# Altium PCB PlacaFiltroFinal.PcbDoc
Units mm, origin at the board's own origin, x right, y up, seen from the top; angles counter-clockwise.
Board outline 150 x 100 mm, 2 copper layers (Top Layer, Bottom Layer); 98 components, 70 nets, 261 pads, 36 vias.
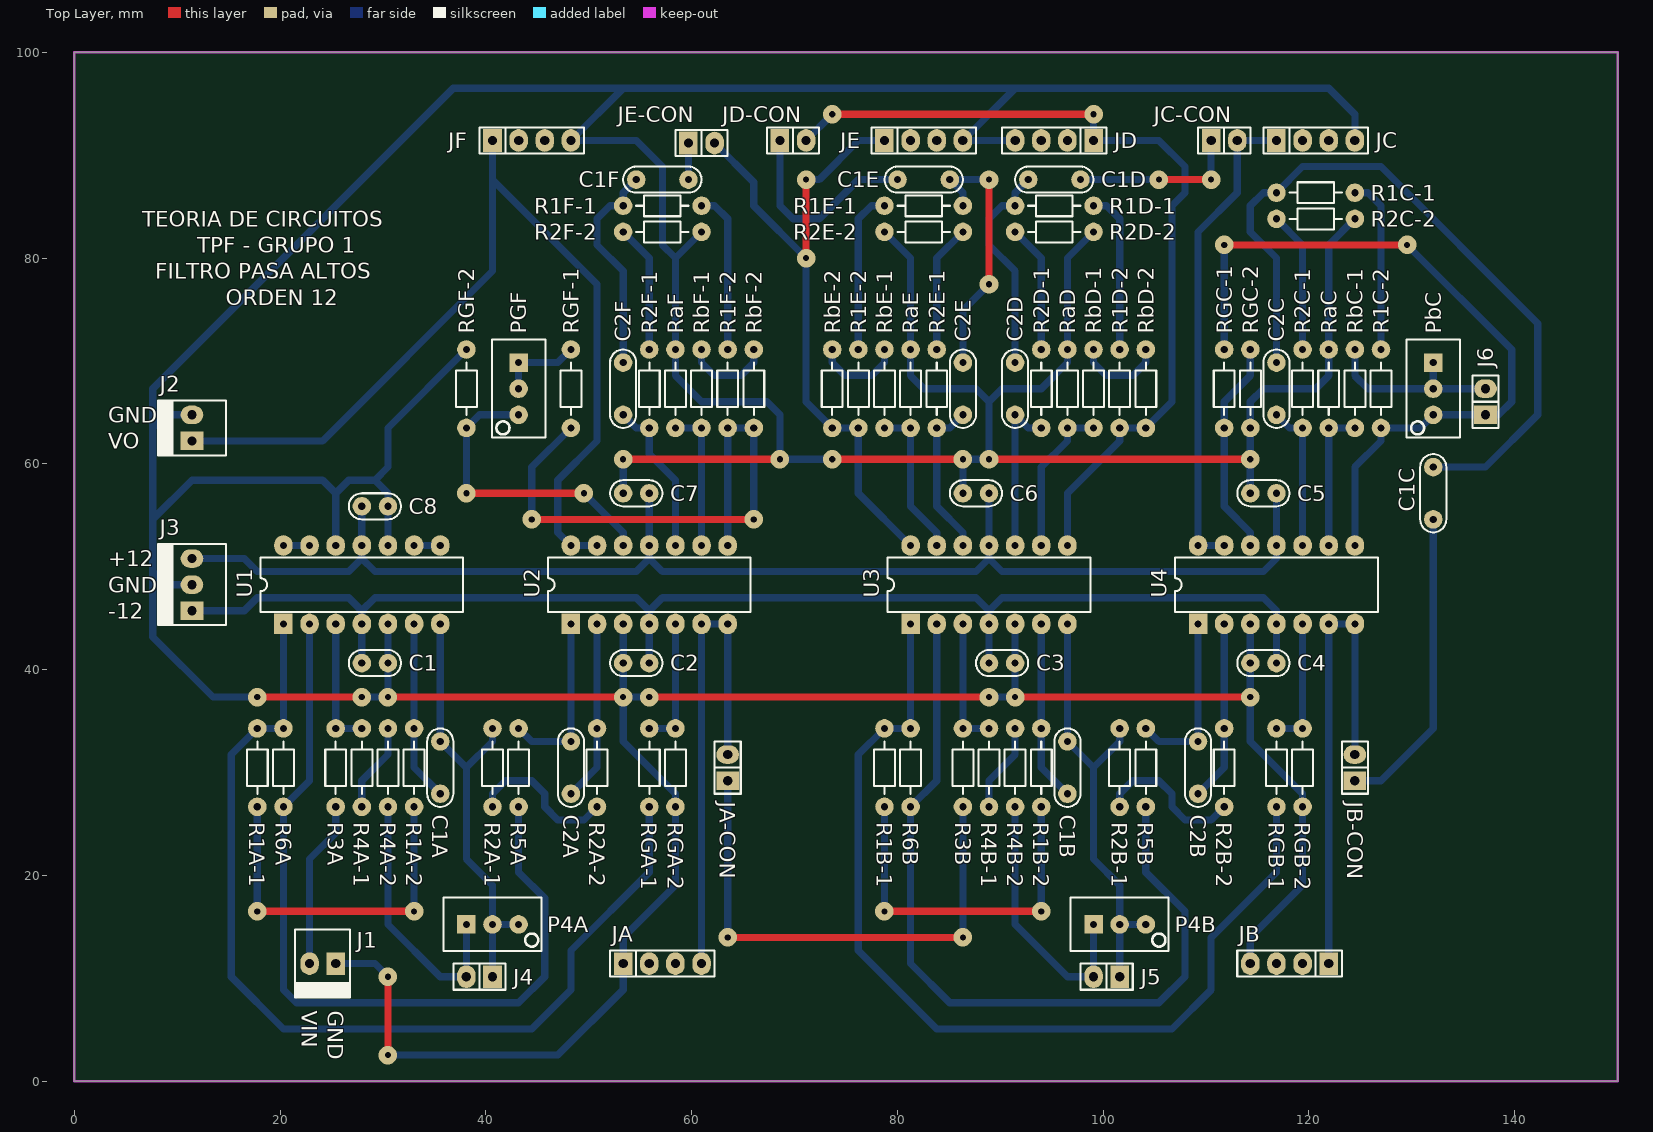
[diagram p0: Top Layer view]
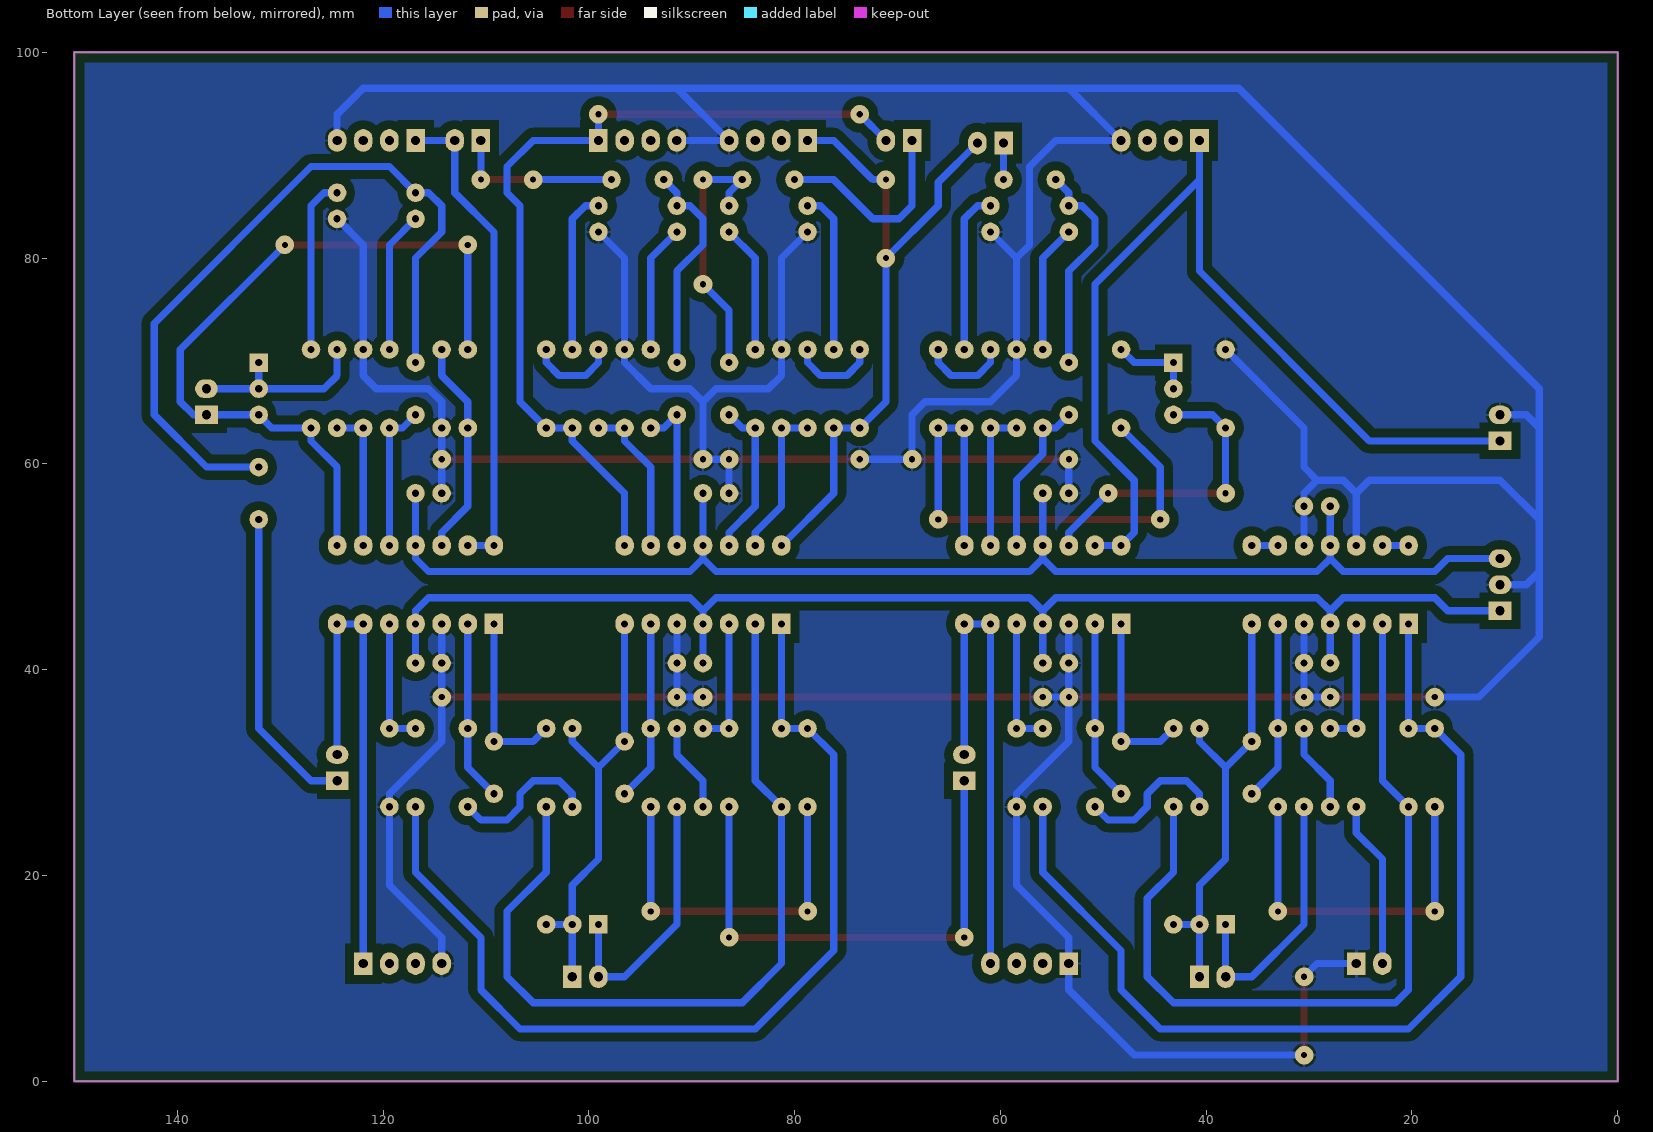
[diagram p1: Bottom Layer view, seen from below]
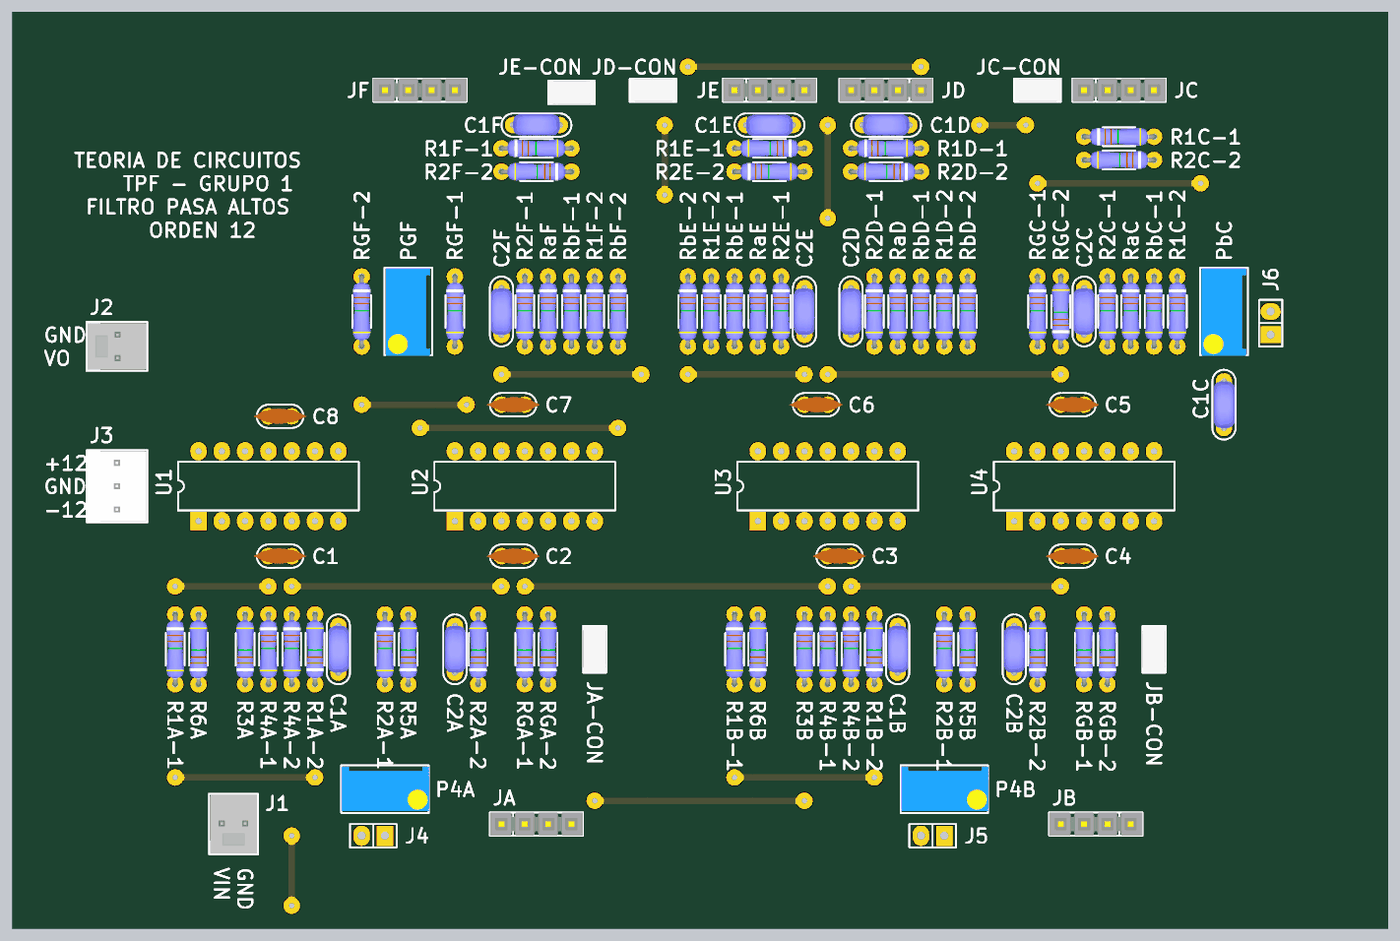
[diagram p2: 3D render of the assembled board from above, using the file's embedded part models]

## Layer stack, top to bottom
Top Solder: solder mask 0.0102, Solder Resist, Dk 3.5
Top Layer: signal copper 0.0356
Dielectric 1: dielectric 0.32, FR-4, Dk 4.8
Bottom Layer: signal copper 0.0356
Bottom Solder: solder mask 0.0102, Solder Resist, Dk 3.5

## Board outline
0,0 0,100 150,100 150,0

## Design rules (kind name [scope] priority, off if disabled: settings)
Clearance [All] p1: gap=0.7
PolygonConnect [All] p1: connectstyle=Relief reliefconductorwidth=0.254 reliefentries=4 polygonreliefangle="90 Angle" airgapwidth=0.254
RoutingVias [All] p1: holewidth=0.6 width=1.8 viastyle="Through Hole" minholewidth=0.6 minwidth=1.8 maxholewidth=0.6 maxwidth=1.8
SolderMaskExpansion [All] p1: expansion=0.102
Width [All] p1: maxlimit=0.7 minlimit=0.7 preferedwidth=0.7
30 further rules are at their usual default settings.

## Components (designator, comment, footprint, x,y, rotation, side; value= is the part's Value field where it differs from the comment)
C1 "100n" CAP100 29.21,40.64 r0 top
C1A "1n" CAP200 35.56,30.48 r90 top
C1B "4.7n" CAP200 96.52,30.48 r90 top
C1C "5.6n" CAP200 132.08,57.15 r90 top
C1D "3.3n" CAP200 95.25,87.63 r180 top
C1E "3.3n" CAP200 82.55,87.63 r0 top
C1F "2.2n" CAP200 57.15,87.63 r180 top
C2 "100n" CAP100 54.61,40.64 r180 top
C2A "1n" CAP200 48.26,30.48 r90 top
C2B "4.7n" CAP200 109.22,30.48 r90 top
C2C "5.6n" CAP200 116.84,67.31 r270 top
C2D "3.3n" CAP200 91.44,67.31 r270 top
C2E "3.3n" CAP200 86.36,67.31 r270 top
C2F "2.2n" CAP200 53.34,67.31 r270 top
C3 "100n" CAP100 90.17,40.64 r0 top
C4 "100n" CAP100 115.57,40.64 r180 top
C5 "100n" CAP100 115.57,57.15 r180 top
C6 "100n" CAP100 87.63,57.15 r180 top
C7 "100n" CAP100 54.61,57.15 r180 top
C8 "100n" CAP100 29.21,55.88 r0 top
J1 "VIN" MOLEX2 25.4,11.43 r180 top
J2 "VOUT" MOLEX2 11.43,62.23 r90 top
J3 "FUENTE" MOLEX3 11.43,45.72 r90 top
J4 "P4A" SIP2 39.37,10.16 r180 top
J5 "P4B" SIP2 100.33,10.16 r180 top
J6 "PbC" SIP2 137.16,66.04 r90 top
JA "KHN1" SIP4 57.15,11.43 r0 top
JA-CON "KHN1-KHN2" JUMPER2 63.5,30.48 r90 top
JB "KHN2" SIP4 118.11,11.43 r180 top
JB-CON "KHN2-SK3" JUMPER2 124.46,30.48 r90 top
JC "SK3" SIP4 120.65,91.44 r0 top
JC-CON "SK3-SK4" JUMPER2 111.76,91.44 r0 top
JD "SK4" SIP4 95.25,91.44 r180 top
JD-CON "SK4-SK5" JUMPER2 69.85,91.44 r0 top
JE "SK5" SIP4 82.55,91.44 r0 top
JE-CON "SK5-SK6" JUMPER2 60.96,91.186 r0 top
JF "SK6" SIP4 44.45,91.44 r0 top
P4A "2K" "PRESET V" 40.64,15.24 r0 top
P4B "2K" "PRESET V" 101.6,15.24 r0 top
PbC "500" "PRESET V" 132.08,67.31 r270 top
PGF "10K" "PRESET V" 43.18,67.31 r270 top
R1A-1 "12K" RES300 17.78,34.29 r270 top
R1A-2 "220" RES300 33.02,26.67 r90 top
R1B-1 "2K" RES300 78.74,34.29 r270 top
R1B-2 "470" RES300 93.98,26.67 r90 top
R1C-1 "1K1" RES300 116.84,86.36 r0 top
R1C-2 "680" RES300 127,71.12 r270 top
R1D-1 "2K" RES300 91.44,85.09 r0 top
R1D-2 "470" RES300 101.6,71.12 r270 top
R1E-1 "1K74" RES300 86.36,85.09 r180 top
R1E-2 "120" RES300 76.2,71.12 r270 top
R1F-1 "2K" RES300 53.34,85.09 r0 top
R1F-2 "120" RES300 63.5,71.12 r270 top
R2A-1 "12K" RES300 40.64,34.29 r270 top
R2A-2 "220" RES300 50.8,26.67 r90 top
R2B-1 "2K" RES300 101.6,34.29 r270 top
R2B-2 "470" RES300 111.76,26.67 r90 top
R2C-1 "1K1" RES300 119.38,71.12 r270 top
R2C-2 "680K" RES300 124.46,83.82 r180 top
R2D-1 "2K" RES300 93.98,71.12 r270 top
R2D-2 "470" RES300 99.06,82.55 r180 top
R2E-1 "1K74" RES300 83.82,71.12 r270 top
R2E-2 "120" RES300 78.74,82.55 r0 top
R2F-1 "2K" RES300 55.88,71.12 r270 top
R2F-2 "120" RES300 60.96,82.55 r180 top
R3A "1K" RES300 25.4,26.67 r90 top
R3B "2K2" RES300 86.36,34.29 r270 top
R4A-1 "12K" RES300 27.94,34.29 r270 top
R4A-2 "1K" RES300 30.48,34.29 r270 top
R4B-1 "10K" RES300 88.9,34.29 r270 top
R4B-2 "1K" RES300 91.44,34.29 r270 top
R5A "15K" RES300 43.18,26.67 r90 top
R5B "10K" RES300 104.14,26.67 r90 top
R6A "15K" RES300 20.32,26.67 r90 top
R6B "10K" RES300 81.28,26.67 r90 top
RaC "1K" RES300 121.92,71.12 r270 top
RaD "1K5" RES300 96.52,71.12 r270 top
RaE "10K" RES300 81.28,71.12 r270 top
RaF "10K" RES300 58.42,71.12 r270 top
RbC-1 "1K2" RES300 124.46,71.12 r270 top
RbD-1 "1K74" RES300 99.06,71.12 r270 top
RbD-2 "X" RES300 104.14,71.12 r270 top
RbE-1 "3K9" RES300 78.74,71.12 r270 top
RbE-2 "2K7" RES300 73.66,71.12 r270 top
RbF-1 "1K" RES300 60.96,71.12 r270 top
RbF-2 "120" RES300 66.04,71.12 r270 top
RGA-1 "47K" RES300 55.88,26.67 r90 top
RGA-2 "47K" RES300 58.42,26.67 r90 top
RGB-1 "47K" RES300 116.84,26.67 r90 top
RGB-2 "56K" RES300 119.38,26.67 r90 top
RGC-1 "15K" RES300 111.76,71.12 r270 top
RGC-2 "10K" RES300 114.3,63.5 r90 top
RGF-1 "15K" RES300 48.26,71.12 r270 top
RGF-2 "10K" RES300 38.1,71.12 r270 top
U1 "TL084ACN" 646-06 27.94,48.26 r0 top
U2 "TL084ACN" 646-06 55.88,48.26 r0 top
U3 "TL084ACN" 646-06 88.9,48.26 r0 top
U4 "TL084ACN" 646-06 116.84,48.26 r0 top

## Footprints (in the part's own frame and the unit in brackets; to place one, negate y for a bottom-side part, rotate by r counter-clockwise, add the part's x,y. Pads: shape width x height; smd on the part's side, far side on the other; paste and mask are expansions set on the pad)
646-06 [mm] "DIP; 14 Leads; Row Spacing 7.62 mm; Pitch 2.54 mm"
  rect 1.8x2 hole 0.7: 1(-7.62,-3.81)
  oval 1.8x2 hole 0.7: 2(-5.08,-3.81) 3(-2.54,-3.81) 4(0,-3.81) 5(2.54,-3.81) 6(5.08,-3.81) 7(7.62,-3.81) 8(7.62,3.81) 9(5.08,3.81) 10(2.54,3.81) 11(0,3.81) 12(-2.54,3.81) 13(-5.08,3.81) 14(-7.62,3.81)
  silkscreen extent -9.85,-2.65 9.85,2.65
CAP100 [mm]
  round 1.8 hole 0.7: 1(-1.27,0) 2(1.27,0)
  silkscreen extent -2.54,-1.27 2.54,1.27, body extent -2.92,-0.84 2.92,0.86, height 6.12
CAP200 [mm]
  round 1.8 hole 0.7: 1(-2.54,0) 2(2.54,0)
  silkscreen extent -3.81,-1.27 3.81,1.27, body extent -2.79,-1.17 2.79,1.12, height 6.24
JUMPER2 [mm]
  rect 1.8x2.2 hole 0.9: 1(-1.27,0)
  oval 1.8x2.2 hole 0.9: 2(1.27,0)
  silkscreen extent -2.54,-1.27 2.54,1.27, body extent -2.46,-1.27 2.54,1.27, height 9.5
MOLEX2 [mm]
  rect 1.8x2.2 hole 0.9: 1(0,0)
  oval 1.8x2.2 hole 0.9: 2(2.54,0)
  silkscreen extent -1.4,-3.3 3.94,3.3, body extent -1.27,-3.17 3.81,3.18, height 10.74
MOLEX3 [mm]
  rect 1.8x2.2 hole 0.9: 1(0,0)
  oval 1.8x2.2 hole 0.9: 2(2.54,0) 3(5.08,0)
  silkscreen extent -1.4,-3.3 6.48,3.3, body extent -1.27,-3.17 6.35,3.18, height 10.74
"PRESET V" [mm]
  rect 1.8x1.8 hole 0.7: 1(-2.54,0)
  round 1.8 hole 0.7: 2(0,0) 3(2.54,0)
  silkscreen extent -4.76,-2.6 4.76,2.6, body extent -4.7,-2.42 4.83,2.42, height 11.55
RES300 [mm]
  round 1.8 hole 0.7: 1(0,0) 2(7.62,0)
  silkscreen extent 1.27,-1.02 6.35,1.02, body extent -0.25,-0.97 7.87,0.97, height 2.01
SIP2 [mm]
  rect 1.8x2.2 hole 0.9: 1(-1.27,0)
  oval 1.8x2.2 hole 0.9: 2(1.27,0)
  silkscreen extent -2.54,-1.27 2.54,1.27
SIP4 [mm]
  rect 1.8x2.2 hole 0.9: 1(-3.81,0)
  oval 1.8x2.2 hole 0.9: 2(-1.27,0) 3(1.27,0) 4(3.81,0)
  silkscreen extent -5.08,-1.27 5.08,1.27, body extent -5.08,-1.27 5.08,1.27, height 8.38

## Part data
C1 C1A C1B C1C C1D C1E C1F C2 C2A C2B C2C C2D C2E C2F C3 C4 C5 C6 C7 C8: library part CAP
J1 J2: library part MOLEX2
J3: library part MOLEX3
J4 J5 J6: library part CON2
JA JB JC JD JE JF: library part CON4
JA-CON JB-CON JC-CON JD-CON JE-CON: library part JUMPER
P4A P4B PbC PGF: library part PRESET
R1A-1 R1A-2 R1B-1 R1B-2 R1C-1 R1C-2 R1D-1 R1D-2 R1E-1 R1E-2 R1F-1 R1F-2 R2A-1 R2A-2 R2B-1 R2B-2 R2C-1 R2C-2 R2D-1 R2D-2 R2E-1 R2E-2 R2F-1 R2F-2 R3A R3B R4A-1 R4A-2 R4B-1 R4B-2 R5A R5B R6A R6B RaC RaD RaE RaF RbC-1 RbD-1 RbD-2 RbE-1 RbE-2 RbF-1 RbF-2 RGA-1 RGA-2 RGB-1 RGB-2 RGC-1 RGC-2 RGF-1 RGF-2: library part RES
U1 U2 U3 U4: "JFET-Input Operational Amplifier"

## Via types
v1: diameter 1.8, hole 0.6, Top Layer to Bottom Layer, 36 vias

## Nets (pads, with @x,y where several pads share a name; then routed paths per layer and width w, separated by ;. In a path a pad name is that pad's centre, name@x,y a point inside that pad or via, vN(x,y) a via of type N, cw(c..) or ccw(c..) an arc to the next point about the centre after c; other vN are vias at no path point)
GND: C1.2 C2.2 C3.2 C4.2 C5.2 C6.2 C7.2 C8.2 J1.1 J2.2 J3.2 JA.1 JB.4 JC.4 JD.4 JE.4 JF.4 R2C-2.1 R2D-2.1 R2E-2.1 R2F-2.1 RaC.1 RaD.1 RaE.1 RaF.1 RGA-2.1 RGB-2.1 RGC-2.1 RGF-2.1 U1.5 U1.10 U1.12 U2.3 U3.5 U4.3 | length 680.5
  Top Layer w0.7: v1(17.78,37.338) v1(27.94,37.338) ; v1(30.48,2.54) v1(30.48,10.16) ; v1(30.48,37.338) v1(53.34,37.338) ; v1(53.34,60.452) v1(68.58,60.452) ; v1(55.88,37.338) v1(88.9,37.338) ; v1(73.66,60.452) v1(86.36,60.452) ; v1(88.9,60.452) v1(114.3,60.452) ; v1(91.44,37.338) v1(114.3,37.338)
  Bottom Layer w0.7: J3.2 8.89,48.26 7.62,49.53 ; J2.2 8.89,64.77 7.62,63.5 ; v1(17.78,37.338) 13.462,37.338 7.62,43.18 7.62,49.53 ; J1.1 29.21,11.43 v1(30.48,10.16) ; U1.12 25.4,57.15 ; v1(27.94,37.338) v1(30.48,37.338) C1.2 U1.5 ; v1(30.48,2.54) 46.99,2.54 53.34,8.89 JA.1 53.34,13.97 58.42,19.05 RGA-2.1 58.42,27.94 53.34,33.02 v1(53.34,37.338) ; U1.10 C8.2 30.48,57.15 29.21,58.42 ; RGF-2.1 30.48,63.5 30.48,59.69 29.21,58.42 ; U2.3 C2.2 v1(53.34,37.338) ; C7.2 v1(53.34,60.452) ; v1(55.88,37.338) v1(53.34,37.338) ; R2F-2.1 58.42,80.01 ; v1(73.66,60.452) v1(68.58,60.452) 68.58,64.77 67.31,66.04 60.96,66.04 58.42,68.58 RaF.1 58.42,80.01 ; R2E-2.1 81.28,80.01 RaE.1 81.28,68.58 82.55,67.31 87.63,67.31 88.9,66.04 ; C6.2 v1(86.36,60.452) v1(88.9,60.452) 88.9,66.04 ; v1(88.9,37.338) v1(91.44,37.338) C3.2 U3.5 ; JD.4 JE.4 91.44,96.52 ; R2D-2.1 96.52,80.01 RaD.1 96.52,69.85 93.98,67.31 90.17,67.31 88.9,66.04 ; JB.4 114.3,13.97 119.38,19.05 RGB-2.1 119.38,27.94 114.3,33.02 v1(114.3,37.338) C4.2 U4.3 ; C5.2 v1(114.3,60.452) RGC-2.1 114.3,66.04 115.57,67.31 120.65,67.31 121.92,68.58 RaC.1 121.92,81.28 R2C-2.1 ; JC.4 124.46,93.98 121.92,96.52 91.44,96.52 ; 7.62,49.53 7.62,54.61 ; 7.62,54.61 7.62,63.5 ; 7.62,54.61 11.43,58.42 24.13,58.42 25.4,57.15 ; 7.62,63.5 7.62,67.31 36.83,96.52 53.34,96.52 ; 25.4,57.15 26.67,58.42 29.21,58.42 ; 53.34,96.52 91.44,96.52 ; 53.34,96.52 JF.4 54.61,91.44 57.15,88.9 57.15,81.28 58.42,80.01
KHN1-KHN2: JA-CON.2 JA.4 U2.6 U2.7 | length 48.3
  Bottom Layer w0.7: JA.4 U2.6 U2.7 JA-CON.2
NetC1A_1: C1A.1 R1A-2.2 U1.6 | length 17.6
  Bottom Layer w0.7: U1.6 R1A-2.2 33.02,30.48 C1A.1
NetC1A_2: C1A.2 J4.1 P4A.2 P4A.3 R2A-1.1 U1.7 | length 43.8
  Bottom Layer w0.7: U1.7 C1A.2 38.1,30.48 ; J4.1 P4A.2 ; R2A-1.1 40.64,33.02 38.1,30.48 ; P4A.3 P4A.2 ; 38.1,30.48 38.1,21.59 40.64,19.05 P4A.2
NetC1B_1: C1B.1 R1B-2.2 U3.6 | length 17.6
  Bottom Layer w0.7: U3.6 R1B-2.2 93.98,30.48 C1B.1
NetC1B_2: C1B.2 J5.1 P4B.2 P4B.3 R2B-1.1 U3.7 | length 43.8
  Bottom Layer w0.7: U3.7 C1B.2 99.06,30.48 ; J5.1 P4B.2 ; R2B-1.1 101.6,33.02 99.06,30.48 ; P4B.3 P4B.2 ; 99.06,30.48 99.06,21.59 101.6,19.05 P4B.2
NetC1C_1: C1C.1 JB-CON.1 | length 30
  Bottom Layer w0.7: JB-CON.1 127,29.21 132.08,34.29 C1C.1
NetC1C_2: C1C.2 C2C.1 R1C-1.1 | length 73.3
  Bottom Layer w0.7: C2C.1 116.84,80.01 114.3,82.55 114.3,85.09 115.57,86.36 R1C-1.1 119.38,88.9 127,88.9 142.24,73.66 142.24,64.77 137.16,59.69 C1C.2
NetC1D_1: C1D.1 JC-CON.1 | length 16.5
  Top Layer w0.7: v1(105.41,87.63) v1(110.49,87.63)
  Bottom Layer w0.7: C1D.1 v1(105.41,87.63) ; v1(110.49,87.63) JC-CON.1
NetC1D_2: C1D.2 C2D.1 R1D-1.1 | length 21.2
  Bottom Layer w0.7: C2D.1 91.44,78.74 88.9,81.28 88.9,83.82 90.17,85.09 R1D-1.1 91.44,86.36 C1D.2
NetC1E_1: C1E.1 JD-CON.1 | length 19.9
  Bottom Layer w0.7: JD-CON.1 68.58,85.09 69.85,83.82 72.39,83.82 76.2,87.63 C1E.1
NetC1E_2: C1E.2 C2E.1 R1E-1.1 | length 25.7
  Top Layer w0.7: v1(88.9,77.47) v1(88.9,87.63)
  Bottom Layer w0.7: C2E.1 86.36,74.93 v1(88.9,77.47) ; R1E-1.1 86.36,86.36 C1E.2 v1(88.9,87.63)
NetC1F_1: C1F.1 JE-CON.1 | length 3.6
  Bottom Layer w0.7: C1F.1 JE-CON.1
NetC1F_2: C1F.2 C2F.1 R1F-1.1 | length 21.2
  Bottom Layer w0.7: C2F.1 53.34,78.74 50.8,81.28 50.8,83.82 52.07,85.09 R1F-1.1 53.34,86.36 C1F.2
NetC2A_1: C2A.1 R2A-2.2 U2.2 | length 17.6
  Bottom Layer w0.7: C2A.1 50.8,30.48 R2A-2.2 U2.2
NetC2A_2: C2A.2 R5A.2 U2.1 | length 17
  Bottom Layer w0.7: R5A.2 44.45,33.02 C2A.2 U2.1
NetC2B_1: C2B.1 R2B-2.2 U4.2 | length 17.6
  Bottom Layer w0.7: C2B.1 111.76,30.48 R2B-2.2 U4.2
NetC2B_2: C2B.2 R5B.2 U4.1 | length 17
  Bottom Layer w0.7: R5B.2 105.41,33.02 C2B.2 U4.1
NetC2C_2: C2C.2 R2C-1.2 U4.10 | length 14.5
  Bottom Layer w0.7: C2C.2 118.11,63.5 R2C-1.2 U4.10
NetC2D_2: C2D.2 R2D-1.2 U3.10 | length 15.8
  Bottom Layer w0.7: U3.10 C2D.2 92.71,63.5 R2D-1.2
NetC2E_2: C2E.2 R2E-1.2 U3.12 | length 15.5
  Bottom Layer w0.7: U3.12 86.36,53.34 83.82,55.88 R2E-1.2 85.09,63.5 C2E.2
NetC2F_2: C2F.2 R2F-1.2 U2.10 | length 15.5
  Bottom Layer w0.7: C2F.2 54.61,63.5 R2F-1.2 55.88,60.96 58.42,58.42 U2.10
NetJ1_2: J1.2 R3A.1 | length 16.3
  Bottom Layer w0.7: J1.2 22.86,21.59 25.4,24.13 R3A.1
NetJ2_1: J2.1 JF.1 U2.13 U2.14 | length 93.2
  Bottom Layer w0.7: J2.1 24.13,62.23 40.64,78.74 40.64,87.63 ; JF.1 40.64,87.63 ; U2.13 U2.14 46.99,53.34 46.99,58.42 50.8,62.23 50.8,77.47 40.64,87.63
NetJ4_2: J4.2 P4A.1 R4A-2.2 | length 26.2
  Bottom Layer w0.7: R4A-2.2 30.48,15.24 35.56,10.16 J4.2 P4A.1
NetJ5_2: J5.2 P4B.1 R4B-2.2 | length 26.2
  Bottom Layer w0.7: R4B-2.2 91.44,15.24 96.52,10.16 J5.2 P4B.1
NetJ6_1: J6.1 PbC.3 R1C-2.2 RGC-1.1 U4.8 | length 73.6
  Top Layer w0.7: v1(111.76,81.28) v1(129.54,81.28)
  Bottom Layer w0.7: RGC-1.1 v1(111.76,81.28) ; U4.8 124.46,59.69 127,62.23 R1C-2.2 130.81,63.5 PbC.3 J6.1 138.43,64.77 139.7,66.04 139.7,71.12 v1(129.54,81.28)
NetJ6_2: J6.2 PbC.1 PbC.2 RbC-1.1 | length 18.3
  Bottom Layer w0.7: RbC-1.1 124.46,68.58 125.73,67.31 PbC.2 ; PbC.1 PbC.2 ; J6.2 PbC.2
NetJA-CON_1: JA-CON.1 R3B.2 | length 50.8
  Top Layer w0.7: v1(63.5,13.97) v1(86.36,13.97)
  Bottom Layer w0.7: v1(63.5,13.97) JA-CON.1 ; v1(86.36,13.97) R3B.2
NetJB_1: JB-CON.2 JB.1 U4.6 U4.7 | length 48.3
  Bottom Layer w0.7: JB.1 U4.6 U4.7 JB-CON.2
NetJC_1: JC-CON.2 JC.1 U4.13 U4.14 | length 47.3
  Bottom Layer w0.7: U4.13 U4.14 109.22,82.55 113.03,86.36 JC-CON.2 JC.1
NetJE_1: JE-CON.2 JE.1 R1E-2.2 RbE-2.2 U3.14 | length 65.3
  Top Layer w0.7: v1(71.12,80.01) v1(71.12,87.63)
  Bottom Layer w0.7: JE-CON.2 66.04,87.376 66.04,85.09 v1(71.12,80.01) 71.12,66.04 RbE-2.2 R1E-2.2 76.2,57.15 U3.14 ; v1(71.12,87.63) 72.39,87.63 76.2,91.44 JE.1
NetPGF_1: PGF.1 PGF.2 RGF-1.1 | length 8.1
  Bottom Layer w0.7: PGF.2 PGF.1 46.99,69.85 RGF-1.1
NetPGF_3: PGF.3 RGF-2.2 U2.12 | length 30
  Top Layer w0.7: v1(38.1,57.15) v1(49.53,57.15)
  Bottom Layer w0.7: v1(38.1,57.15) RGF-2.2 39.37,64.77 PGF.3 ; v1(49.53,57.15) 53.34,53.34 U2.12
NetR1A-1_2: R1A-1.2 R1A-2.1 | length 35.6
  Top Layer w0.7: v1(17.78,16.51) v1(33.02,16.51)
  Bottom Layer w0.7: v1(17.78,16.51) R1A-1.2 ; v1(33.02,16.51) R1A-2.1
NetR1B-1_2: R1B-1.2 R1B-2.1 | length 35.6
  Top Layer w0.7: v1(78.74,16.51) v1(93.98,16.51)
  Bottom Layer w0.7: v1(78.74,16.51) R1B-1.2 ; v1(93.98,16.51) R1B-2.1
NetR1C-1_2: R1C-1.2 R1C-2.1 | length 17
  Bottom Layer w0.7: R1C-1.2 125.73,86.36 127,85.09 R1C-2.1
NetR1D-1_2: R1D-1.2 R1D-2.1 | length 15.8
  Bottom Layer w0.7: R1D-1.2 100.33,85.09 101.6,83.82 R1D-2.1
NetR1E-1_2: R1E-1.2 R1E-2.1 | length 15.8
  Bottom Layer w0.7: R1E-2.1 76.2,83.82 77.47,85.09 R1E-1.2
NetR1F-1_2: R1F-1.2 R1F-2.1 | length 15.8
  Bottom Layer w0.7: R1F-1.2 62.23,85.09 63.5,83.82 R1F-2.1
NetR1F-2_2: R1F-2.2 RbF-2.2 RGF-1.2 U2.8 | length 54.9
  Top Layer w0.7: v1(44.45,54.61) v1(66.04,54.61)
  Bottom Layer w0.7: v1(44.45,54.61) 44.45,59.69 RGF-1.2 ; U2.8 R1F-2.2 RbF-2.2 v1(66.04,54.61)
NetR2A-1_2: R2A-1.2 R2A-2.1 | length 14.8
  Bottom Layer w0.7: R2A-1.2 40.64,27.94 41.91,29.21 44.45,29.21 45.72,27.94 45.72,26.67 46.99,25.4 49.53,25.4 R2A-2.1
NetR2B-1_2: R2B-1.2 R2B-2.1 | length 14.8
  Bottom Layer w0.7: R2B-1.2 101.6,27.94 102.87,29.21 105.41,29.21 106.68,27.94 106.68,26.67 107.95,25.4 110.49,25.4 R2B-2.1
NetR2C-1_1: R2C-1.1 R2C-2.2 | length 13.8
  Bottom Layer w0.7: R2C-2.2 119.38,81.28 R2C-1.1
NetR2D-1_1: R2D-1.1 R2D-2.2 | length 12.5
  Bottom Layer w0.7: R2D-2.2 93.98,80.01 R2D-1.1
NetR2E-1_1: R2E-1.1 R2E-2.2 | length 12.5
  Bottom Layer w0.7: R2E-1.1 83.82,80.01 R2E-2.2
NetR2F-1_1: R2F-1.1 R2F-2.2 | length 12.5
  Bottom Layer w0.7: R2F-2.2 55.88,80.01 R2F-1.1
NetR3A_2: R3A.2 R4A-1.1 U1.3 | length 12.7
  Bottom Layer w0.7: U1.3 R3A.2 R4A-1.1
NetR3B_1: R3B.1 R4B-1.1 U3.3 | length 12.7
  Bottom Layer w0.7: U3.3 R3B.1 R4B-1.1
NetR4A-1_2: R4A-1.2 R4A-2.1 | length 8.7
  Bottom Layer w0.7: R4A-1.2 27.94,29.21 30.48,31.75 R4A-2.1
NetR4B-1_2: R4B-1.2 R4B-2.1 | length 8.7
  Bottom Layer w0.7: R4B-1.2 88.9,29.21 91.44,31.75 R4B-2.1
NetR5A_1: R5A.1 R6A.1 U1.2 | length 81.2
  Bottom Layer w0.7: U1.2 22.86,29.21 R6A.1 20.32,8.89 21.59,7.62 43.18,7.62 45.72,10.16 45.72,17.78 43.18,20.32 R5A.1
NetR5B_1: R5B.1 R6B.1 U3.2 | length 81.5
  Bottom Layer w0.7: U3.2 83.82,29.21 R6B.1 81.28,11.43 85.09,7.62 105.41,7.62 107.95,10.16 107.95,16.51 104.14,20.32 R5B.1
NetRaC_2: RaC.2 RbC-1.2 U4.9 | length 14
  Bottom Layer w0.7: U4.9 RaC.2 RbC-1.2
NetRaD_2: RaD.2 RbD-1.2 U3.9 | length 15
  Bottom Layer w0.7: U3.9 93.98,59.69 96.52,62.23 RaD.2 RbD-1.2
NetRaE_2: RaE.2 RbE-1.2 U3.13 | length 15
  Bottom Layer w0.7: RbE-1.2 RaE.2 81.28,55.88 83.82,53.34 U3.13
NetRaF_2: RaF.2 RbF-1.2 U2.9 | length 14
  Bottom Layer w0.7: RaF.2 RbF-1.2 U2.9
NetRbD-1_1: RbD-1.1 RbD-2.1 | length 8.7
  Bottom Layer w0.7: RbD-1.1 99.06,69.85 100.33,68.58 102.87,68.58 104.14,69.85 RbD-2.1
NetRbE-1_1: RbE-1.1 RbE-2.1 | length 8.7
  Bottom Layer w0.7: RbE-2.1 73.66,69.85 74.93,68.58 77.47,68.58 78.74,69.85 RbE-1.1
NetRbF-1_1: RbF-1.1 RbF-2.1 | length 8.7
  Bottom Layer w0.7: RbF-1.1 60.96,69.85 62.23,68.58 64.77,68.58 66.04,69.85 RbF-2.1
NetRGA-1_2: RGA-1.2 RGA-2.2 U2.5 | length 12.7
  Bottom Layer w0.7: RGA-1.2 RGA-2.2 U2.5
NetRGB-1_2: RGB-1.2 RGB-2.2 U4.5 | length 12.7
  Bottom Layer w0.7: RGB-1.2 RGB-2.2 U4.5
NetRGC-1_2: RGC-1.2 RGC-2.2 U4.12 | length 21.2
  Bottom Layer w0.7: U4.12 114.3,53.34 111.76,55.88 RGC-1.2 111.76,66.04 114.3,68.58 RGC-2.2
NetU1_8: U1.8 U1.9 | length 2.5
  Bottom Layer w0.7: U1.9 U1.8
NetU1_13: U1.13 U1.14 | length 2.5
  Bottom Layer w0.7: U1.14 U1.13
SK4-SK5: JD-CON.2 JD.1 R1D-2.2 RbD-2.2 U3.8 | length 84.5
  Top Layer w0.7: v1(73.66,93.98) v1(99.06,93.98)
  Bottom Layer w0.7: JD-CON.2 v1(73.66,93.98) ; U3.8 96.52,57.15 101.6,62.23 R1D-2.2 RbD-2.2 106.68,66.04 106.68,85.09 107.95,86.36 107.95,88.9 105.41,91.44 JD.1 v1(99.06,93.98)
VCC: C1.1 C2.1 C3.1 C4.1 J3.1 U1.4 U2.4 U3.4 U4.4 | length 129.9
  Bottom Layer w0.7: J3.1 16.51,45.72 17.78,46.99 26.67,46.99 27.94,45.72 ; C1.1 U1.4 27.94,45.72 ; C2.1 U2.4 55.88,45.72 ; C3.1 U3.4 88.9,45.72 ; C4.1 U4.4 116.84,45.72 115.57,46.99 90.17,46.99 88.9,45.72 ; 27.94,45.72 29.21,46.99 54.61,46.99 55.88,45.72 ; 55.88,45.72 57.15,46.99 87.63,46.99 88.9,45.72
VEE: C5.1 C6.1 C7.1 C8.1 J3.3 U1.11 U2.11 U3.11 U4.11 | length 133.7
  Bottom Layer w0.7: J3.3 16.51,50.8 17.78,49.53 26.67,49.53 27.94,50.8 ; C8.1 U1.11 27.94,50.8 ; C7.1 U2.11 55.88,50.8 ; C6.1 U3.11 88.9,50.8 ; C5.1 U4.11 116.84,50.8 115.57,49.53 90.17,49.53 88.9,50.8 ; 27.94,50.8 29.21,49.53 54.61,49.53 55.88,50.8 ; 55.88,50.8 57.15,49.53 87.63,49.53 88.9,50.8
VHP1: R1A-1.1 R6A.2 RGA-1.1 U1.1 | length 95.5
  Bottom Layer w0.7: U1.1 R6A.2 R1A-1.1 15.24,31.75 15.24,10.16 20.32,5.08 44.45,5.08 48.26,8.89 48.26,12.7 55.88,20.32 RGA-1.1
VHP2: R1B-1.1 R6B.2 RGB-1.1 U3.1 | length 94.8
  Bottom Layer w0.7: U3.1 R6B.2 R1B-1.1 76.2,31.75 76.2,12.7 83.82,5.08 106.68,5.08 110.49,8.89 110.49,13.97 116.84,20.32 RGB-1.1
pads on no net: JA.2 JA.3 JB.2 JB.3 JC.2 JC.3 JD.2 JD.3 JE.2 JE.3 JF.2 JF.3

## Polygon pours and split planes (outlines as drawn)
GND on Bottom Layer "Top Overlay-No Net" (solid, remove dead copper, pour order 2): 0,100 150,100 150,0 0,0

## Keep-outs
Keep-Out Layer:
  the board outline again, w0.254

## Silkscreen, mask and mechanical layers (free items; w line width, h text height)
Top Overlay:
  text "TEORIA DE CIRCUITOS" at 6.604,83.058 h1.52
  text "TPF - GRUPO 1" at 11.938,80.518 h1.52
  text "FILTRO PASA ALTOS" at 7.874,77.978 h1.52
  text "ORDEN 12" at 14.732,75.438 h1.52
  text "GND" at 3.302,64.008 h1.52
  text "VO" at 3.302,61.468 h1.52
  text "+12" at 3.302,50.038 h1.52
  text "GND" at 3.302,47.498 h1.52
  text "-12" at 3.302,44.958 h1.52
  text "VIN" at 22.098,6.858 h1.52 r270
  text "GND" at 24.638,6.858 h1.52 r270